# Altium PCB VALVE_MODULE_20221227.PcbDoc (part 3 of 4)
Units mm, origin at the board's own origin, x right, y up, seen from the top; angles counter-clockwise.
Board outline 260.15 x 142.01 mm, 2 copper layers (Top Layer, Bottom Layer); 455 components, 212 nets, 1302 pads, 385 vias.
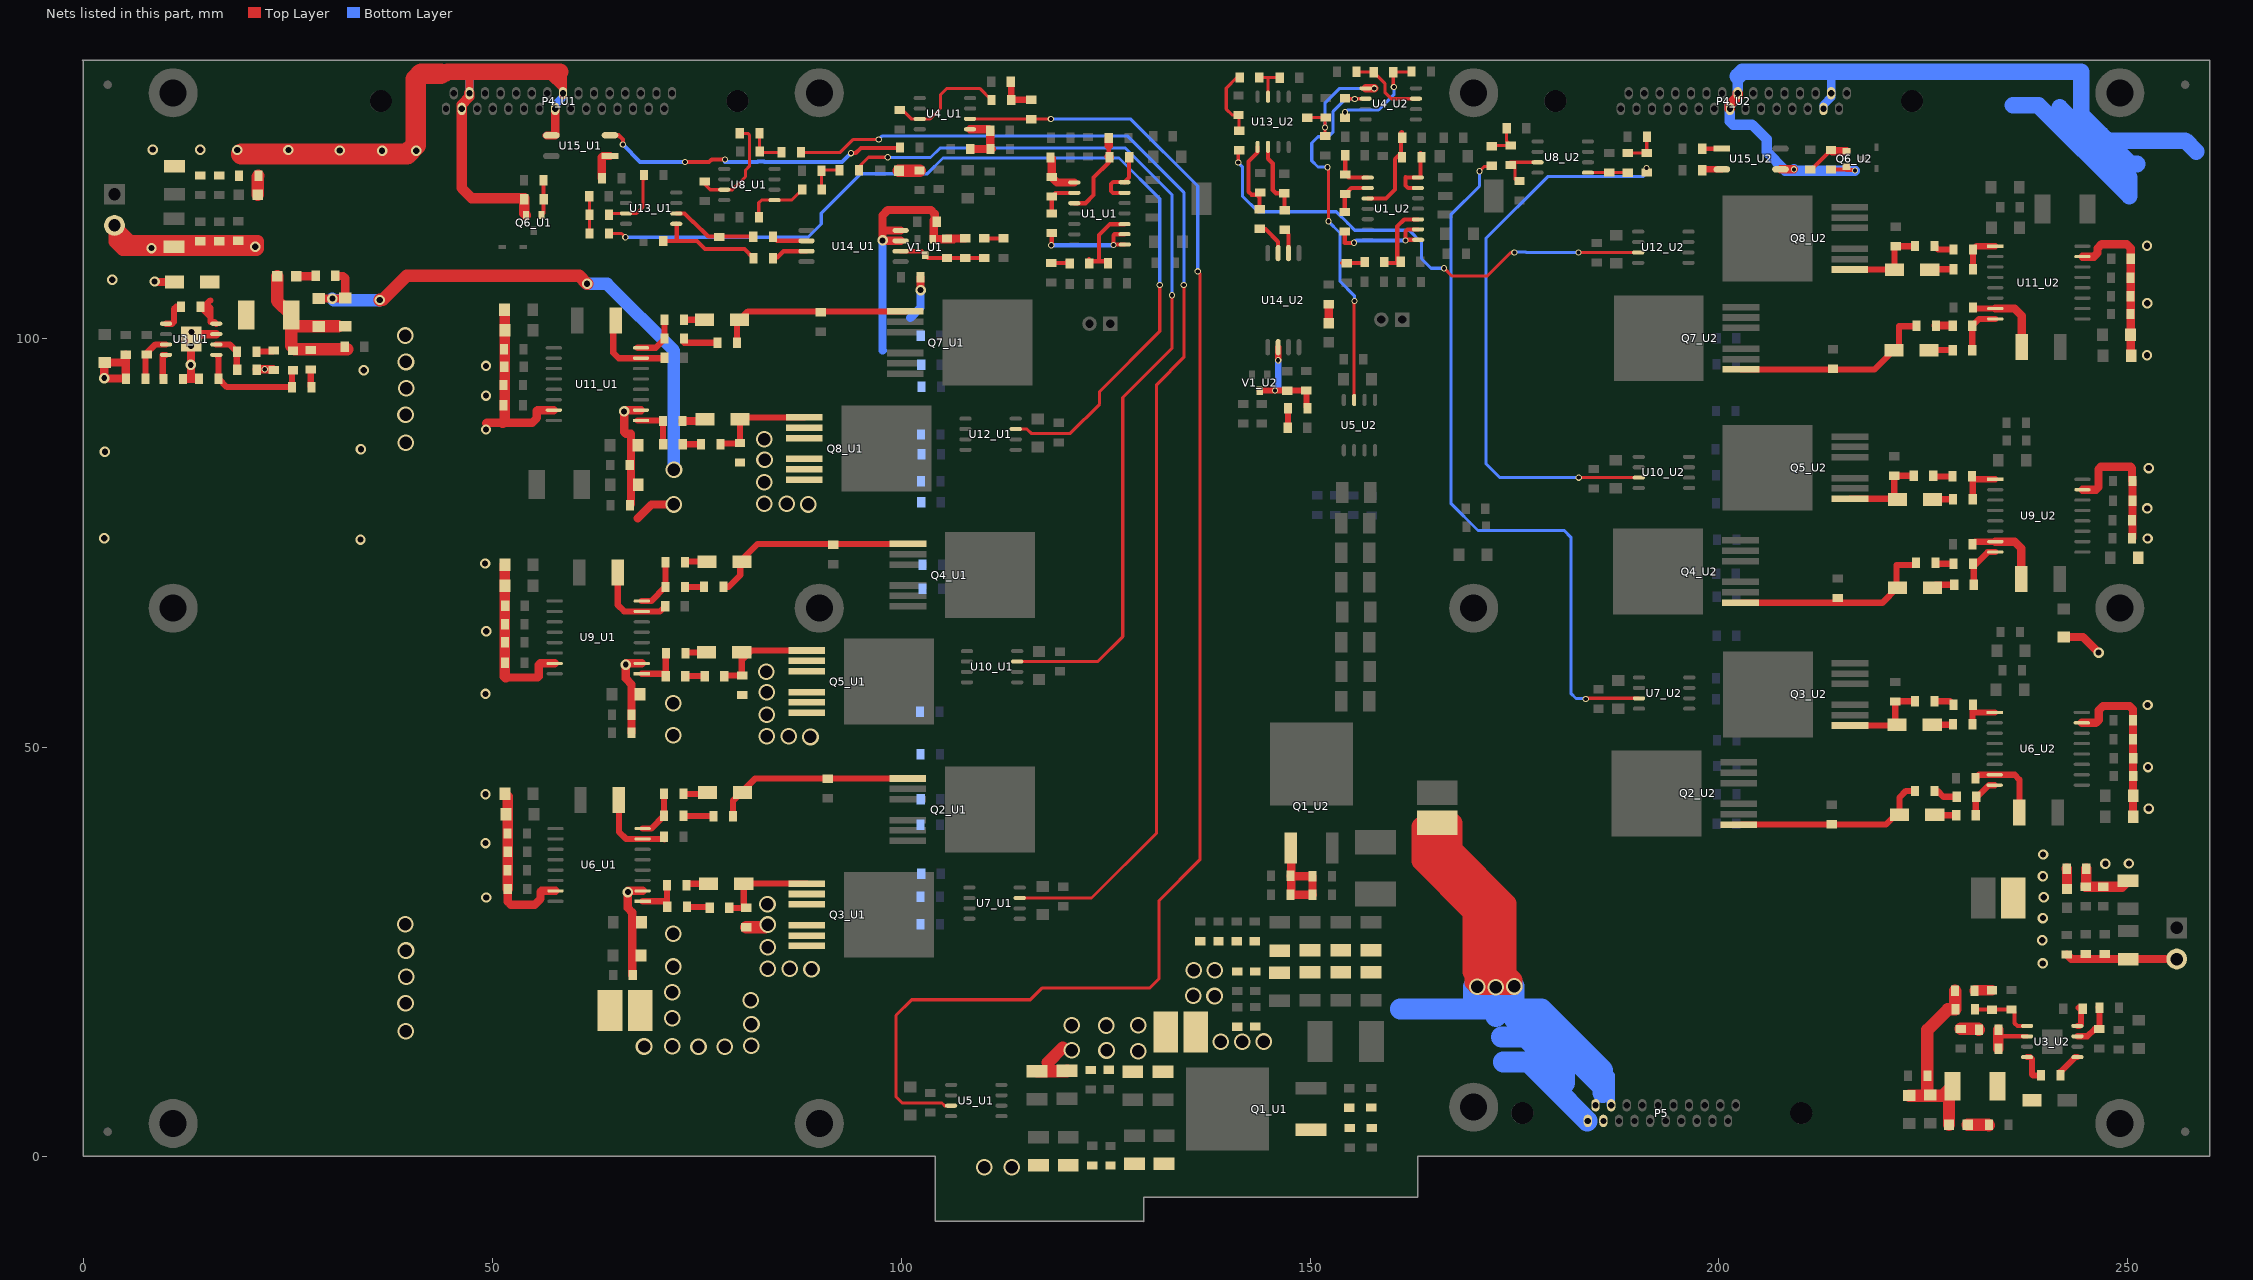
[diagram p3: the nets of this part, all layers, seen from the top]

## Via types
v1: diameter 0.762, hole 0.508, Top Layer to Bottom Layer, 142 vias
v2: diameter 2.032, hole 1.524, Top Layer to Bottom Layer, 140 vias
v3: diameter 1.27, hole 0.762, Top Layer to Bottom Layer, 77 vias
v4: diameter 1.27, hole 0.711, Top Layer to Bottom Layer, 14 vias
v5: diameter 1.778, hole 1.27, Top Layer to Bottom Layer, 12 vias

## Nets (pads, with @x,y where several pads share a name; then routed paths per layer and width w, separated by ;. In a path a pad name is that pad's centre, name@x,y a point inside that pad or via, vN(x,y) a via of type N, cw(c..) or ccw(c..) an arc to the next point about the centre after c; other vN are vias at no path point) (continued)
ISO_GND_U1: C5_U1.2 C6_U1.2 C7_U1.1 C8_U1.1 C9_U1.1 C10_U1.1 C11_U1.1 C41_U1.2 C42_U1.2 C43_U1.2 C44_U1.2 C49_U1.2 C50_U1.2 C51_U1.2 C52_U1.2 C66_U1.2 C67_U1.2 C68_U1.2 C103_U1.2 P2_U1.2 P4_U1.2 P4_U1.8 P4_U1.17 P4_U1.23 Q6_U1.2 R8_U1.1 R21_U1.1 R31_U1.2 R33_U1.2 R48_U1.2 R50_U1.2 R58_U1.1 R63_U1.2 R65_U1.2 U6_U1.15 U9_U1.15 U11_U1.15 U15_U1.4 | length 214.5
  Top Layer w1.016: P4_U1.17@47.231,129.952 47.231,131.788 47.625,132.182 57.048,132.182 ; 49.276,89.611 49.352,89.687 51.308,89.687 54.915,89.687 54.915,89.713 55.474,90.272 55.474,91.135 55.55,91.211 U11_U1.15@57.549,91.211 ; 51.689,58.547 51.714,58.522 55.575,58.522 55.702,58.649 55.702,60.046 55.905,60.249 U9_U1.15@57.651,60.249 ; R33_U1.2@51.918,32.664 51.918,31.115 52.273,30.759 55.22,30.759 55.931,31.471 55.931,32.334 56.032,32.436 U6_U1.15@57.752,32.436 ; R58_U1.1@53.924,117.018 R58_U1.1@53.924,117.119 ; U15_U1.4@56.693,124.79 57.683,124.79 57.709,124.816 P4_U1.8@57.709,128.047 ; P4_U1.23@58.661,129.952 P4_U1.23@58.661,130.569 ; 57.048,132.182 58.344,132.182 58.661,131.864 P4_U1.23@58.661,130.569 ; 57.048,132.182 P4_U1.23@58.661,130.569
  Top Layer w1.27: P4_U1.17@47.231,129.952 47.231,129.527 46.279,128.575 P4_U1.2@46.279,128.047 46.279,118.364 47.523,117.119 R58_U1.1@53.924,117.119 ; 51.308,89.687 51.537,89.916 C66_U1.2@51.537,103.48 ; C49_U1.2@51.562,72.288 C50_U1.2@51.562,69.723 C52_U1.2@51.562,65.049 R48_U1.2@51.562,62.814 R50_U1.2@51.562,60.35 51.562,58.674 51.689,58.547 ; C41_U1.2@51.587,44.298 51.918,43.967 C43_U1.2@51.918,37.211 R33_U1.2@51.918,32.664 ; R58_U1.1@53.924,117.018 53.924,115.291 Q6_U1.2@54.153,115.062
  Top Layer w1.524: 3.835,111.811 4.826,110.82 21.234,110.82 21.336,110.922 21.336,111.887 5.74,111.887 P2_U1.2@3.835,113.792 3.835,111.811
  Top Layer w2.032: 43.688,132.349 44.272,132.349 44.526,132.603 58.344,132.603
  Top Layer w2.54: 19.329,122.53 39.599,122.53 40.665,123.596 40.665,131.674 41.341,132.349 43.688,132.349
  Bottom Layer w1.016: P4_U1.17@47.231,129.952 47.231,131.788 47.701,132.258 58.369,132.258 58.661,131.966 P4_U1.23@58.661,129.952 58.661,129.476 57.709,128.524 P4_U1.8@57.709,128.047
  other v2: 39.446,15.265 39.421,18.694 39.497,21.92 39.472,25.146 39.37,28.372 39.446,87.224 39.421,90.653 39.497,93.878 39.472,97.104 39.37,100.33
  other v3: 49.276,31.623 49.2,38.278 49.2,44.247 49.2,56.515 49.276,64.186 49.149,72.466 49.251,88.849 49.251,92.989 49.251,96.622 8.357,111.023 21.031,111.201 36.551,122.911 40.716,122.911 31.369,122.961 18.847,123.012 25.095,123.012 14.326,123.038 8.509,123.063
ISO_GND_U2: C5_U2.2 C6_U2.2 C7_U2.1 C8_U2.1 C9_U2.1 C10_U2.1 C11_U2.1 C41_U2.2 C42_U2.2 C43_U2.2 C44_U2.2 C49_U2.2 C50_U2.2 C51_U2.2 C52_U2.2 C66_U2.2 C67_U2.2 C68_U2.2 C103_U2.2 P2_U2.2 P4_U2.2 P4_U2.8 P4_U2.17 P4_U2.23 Q6_U2.2 R8_U2.1 R21_U2.1 R31_U2.2 R33_U2.2 R48_U2.2 R50_U2.2 R58_U2.1 R63_U2.2 R65_U2.2 U6_U2.15 U9_U2.15 U11_U2.15 U15_U2.4 | length 228.2
  Top Layer w0.508: R58_U2.1@213.69,120.625 Q6_U2.2@215.24,120.625 ; Q6_U2.2@215.595,120.98 Q6_U2.2@215.24,120.625 ; v1(216.611,120.498) 216.611,120.548 216.586,120.574 215.57,120.574 215.519,120.625 Q6_U2.2@215.24,120.625
  Top Layer w1.016: U15_U2.4@207.518,120.65 v1(209.169,120.65) ; C50_U2.2@242.164,63.475 244.5,63.475 v3(246.405,61.57) ; C8_U2.1@242.519,24.663 243.078,24.105 C5_U2.2@250.038,24.105 P2_U2.2@255.956,24.105 ; U6_U2.15@244.355,52.984 246.075,52.984 246.431,53.34 246.431,54.534 246.939,55.042 250.215,55.042 250.622,54.635 R33_U2.2@250.622,53.315 R31_U2.2@250.622,50.952 250.622,41.504 C42_U2.2@250.647,41.478 ; U9_U2.15@244.432,81.483 246.101,81.483 246.405,81.788 246.405,83.998 246.685,84.277 250.342,84.277 250.495,84.125 250.495,82.601 R50_U2.2@250.546,82.55 R48_U2.2@250.546,80.112 250.546,75.59 C51_U2.2@250.495,75.54 ; U11_U2.15@244.432,109.982 245.847,109.982 246.278,110.414 246.278,110.998 246.786,111.506 249.834,111.506 250.342,110.998 R65_U2.2@250.342,109.703 250.342,97.892 C66_U2.2@250.393,97.841
  Top Layer w1.27: P4_U2.23@201.336,128.047 201.336,128.565 202.288,129.517 P4_U2.8@202.288,129.952 ; R8_U2.1@244.907,35.154 244.907,33.02 C7_U2.1@244.831,32.944 C11_U2.1@246.964,32.944 249.25,32.944 C6_U2.2@249.987,33.68
  Bottom Layer w1.016: P4_U2.17@212.766,128.047 212.766,128.514 213.718,129.466 P4_U2.2@213.718,129.952 213.718,132.56 213.69,132.588
  Bottom Layer w1.27: 202.311,132.029 202.288,132.006 P4_U2.8@202.288,129.952 202.288,129.441 201.336,128.489 P4_U2.23@201.336,128.047 201.336,126.502 201.727,126.111 204.038,126.111 205.816,124.333 205.816,122.784 208.102,120.498 v1@209.321,120.498 ; v1(209.169,120.65) v1@209.321,120.498 ; v1(216.611,120.498) v1@209.321,120.498
  Bottom Layer w2.032: 202.311,132.029 202.87,132.588 213.69,132.588 244.272,132.588 244.272,127.381 ; 235.941,128.499 235.941,128.473 239.065,128.473 250.165,117.373 250.165,119.685 244.272,125.578 244.272,125.628 ; 241.656,128.245 244.272,125.628 ; 251.155,121.31 250.342,121.31 247.498,124.155 ; 258.343,122.834 257.023,124.155 247.498,124.155 ; 244.272,125.628 244.958,124.943 246.71,124.943 ; 244.272,125.628 244.272,127.381 ; 244.272,127.381 246.71,124.943 ; 246.71,124.943 247.498,124.155
  other v3: 239.573,23.571 239.522,26.416 239.598,29.108 239.7,31.648 239.598,34.239 247.244,35.763 250.114,35.789 239.624,36.881 252.552,42.494 252.451,47.574 252.4,55.169 252.4,75.514 252.349,79.197 252.527,84.125 252.324,97.917 252.349,104.292 252.324,111.303
NetC13_U1_1: C13_U1.1 D2_U1.2 L1_U1.2 U3_U1.8 | length 6.6
  Top Layer w0.762: 15.57,104.623 C13_U1.1@14.808,103.861 ; U3_U1.8@16.281,101.778 16.078,101.981 15.57,101.981 15.57,102.641 ; C13_U1.1@14.808,103.861 15.418,103.861 15.57,103.708 15.57,102.641 ; C13_U1.1@14.808,103.861 C13_U1.1@14.351,103.861 15.57,102.641
NetC13_U1_2: C13_U1.2 U3_U1.1 | length 3.6
  Top Layer w0.762: U3_U1.1@10.135,101.778 10.871,101.778 11.1,102.006 11.1,103.581 11.379,103.861 C13_U1.2@11.963,103.861
NetC13_U2_1: C13_U2.1 D2_U2.2 L1_U2.2 U3_U2.8 | length 3.7
  Top Layer w0.762: U3_U2.8@237.668,12.116 238.023,12.116 238.277,11.862 238.277,9.982 238.379,9.881 C13_U2.1@239.37,9.881
NetC13_U2_2: C13_U2.2 U3_U2.1 | length 3.3
  Top Layer w0.762: C13_U2.2@241.757,9.881 241.757,10.338 243.535,12.116 U3_U2.1@243.815,12.116
NetC14_U1_1: C14_U1.1 R13_U1.1 R14_U1.2 U4_U1.5 | length 7.5
  Top Layer w1.016: U4_U1.5@108.433,125.552 110.719,125.552 C14_U1.1@110.896,125.374 110.896,123.317 111.074,123.139 R13_U1.1@108.458,123.139
NetC14_U2_1: C14_U2.1 R13_U2.1 R14_U2.2 U4_U2.5 | length 15.2
  Top Layer w0.381: C14_U2.1@149.682,126.975 R14_U2.2@151.917,126.975 ; R13_U2.1@151.841,124.714 R14_U2.2@151.841,126.822
  Top Layer w1.016: U4_U2.5@156.794,130.556 v1(157.861,130.556)
  Bottom Layer w0.381: v1(151.816,125.781) 151.816,128.753 153.619,130.556 v1(157.861,130.556)
NetC21_U1_1: C21_U1.1 C22_U1.1 C23_U1.1 D3_U1.1 L1_U1.1 R20_U1.2 R40_U1.1 | length 22.1
  Top Layer w1.524: D3_U1.1@23.724,107.569 23.724,104.572 L1_U1.1@25.451,102.845 25.451,101.092 ; 31.217,101.448 25.806,101.448 25.451,101.092 ; R40_U1.1@32.309,98.679 30.124,98.679 25.857,98.679 25.451,99.085 25.451,101.092
NetC21_U2_1: C21_U2.1 C22_U2.1 C23_U2.1 D3_U2.1 L1_U2.1 R20_U2.2 R40_U2.1 | length 24.9
  Top Layer w1.524: C22_U2.1@223.241,7.417 227.406,7.417 L1_U2.1@228.117,8.128 ; C21_U2.1@225.806,7.468 225.476,7.798 R40_U2.1@225.476,9.855 225.476,15.443 227.99,17.958 C23_U2.1@228.905,17.958 228.905,20.193 R20_U2.2@228.854,20.244 ; D3_U2.1@228.117,3.861 L1_U2.1@228.117,8.128 ; L1_U2.1@228.549,8.56 L1_U2.1@228.117,8.128
NetC23_U1_2: C23_U1.2 R19_U1.1 R22_U1.2 U3_U1.5 | length 14.2
  Top Layer w0.762: 16.535,97.714 16.561,97.688 R22_U1.2@16.561,95.047 17.577,94.031 R19_U1.1@25.552,94.031 25.552,95.987 C23_U1.2@25.654,96.088
NetC23_U2_2: C23_U2.2 R19_U2.1 R22_U2.2 U3_U2.5 | length 8
  Top Layer w0.508: C23_U2.2@231.292,17.958 231.318,17.932 R22_U2.2@235.763,17.932 236.144,17.551 236.144,16.256 236.499,15.9 236.525,15.926 U3_U2.5@237.668,15.926
NetC26_U1_2: C26_U1.2 U3_U1.4 | length 3.4
  Top Layer w0.762: C26_U1.2@9.83,95.021 9.728,95.123 9.728,97.942 10.109,97.942 U3_U1.4@10.135,97.968
NetC26_U2_2: C26_U2.2 U3_U2.4 | length 2.7
  Top Layer w0.762: U3_U2.4@243.815,15.926 244.069,15.926 244.246,16.104 244.246,17.907 C26_U2.2@243.992,18.161
NetC27_U1_2: C27_U1.2 C28_U1.2 U3_U1.6 | length 5.1
  Top Layer w0.762: U3_U1.6@16.281,99.238 17.932,99.238 C28_U1.2@18.796,98.374 18.796,96.266 C27_U1.2@18.847,96.215
NetC27_U2_2: C27_U2.2 C28_U2.2 U3_U2.6 | length 5.8
  Top Layer w0.508: 234.163,14.656 U3_U2.6@237.668,14.656
  Top Layer w1.27: C27_U2.2@234.163,13.157 234.163,14.656 C28_U2.2@234.163,15.469
NetC28_U1_1: C28_U1.1 R25_U1.2 | length 2.2
  Top Layer w0.762: C28_U1.1@21.184,98.374 23.19,98.374 R25_U1.2@23.317,98.501
NetC28_U2_1: C28_U2.1 R25_U2.2 | length 2.3
  Top Layer w1.524: R25_U2.2@229.54,15.57 231.673,15.57 C28_U2.1@231.775,15.469
NetC31_U1_1: C31_U1.1 R28_U1.2 R29_U1.1 | length 4.7
  Top Layer w0.762: C31_U1.1@113.411,131.343 113.462,131.293 R28_U1.2@113.462,129.134 113.487,129.159 R29_U1.1@115.926,129.159
NetC31_U2_1: C31_U2.1 R28_U2.2 R29_U2.1 | length 12.5
  Top Layer w0.381: R29_U2.1@154.28,127.152 v1(154.28,127.635) v1@154.28,127.711 ; v1(160.249,130.708) 160.172,130.785 R28_U2.2@160.172,132.537 160.198,132.563 162.357,132.563 C31_U2.1@162.408,132.613
  Bottom Layer w0.381: v1(154.28,127.635) 154.559,127.914 158.394,127.914 160.249,129.769 v1(160.249,130.708)
NetC32_U1_1: C32_U1.1 D6_U1.2 U6_U1.7 | length 9.8
  Top Layer w0.762: D6_U1.2@65.507,43.561 65.507,39.649 66.37,38.786 U6_U1.7@68.402,38.786 71.044,38.786 C32_U1.1@71.069,38.76
NetC32_U2_1: C32_U2.1 D6_U2.2 U6_U2.7 | length 9.8
  Top Layer w0.762: C32_U2.1@231.369,46.228 231.775,46.634 U6_U2.7@233.705,46.634 236.144,46.634 236.728,46.05 D6_U2.2@236.728,42.012
NetC33_U1_1: C33_U1.1 R28_U1.1 U4_U1.3 | length 14.9
  Top Layer w0.381: C33_U1.1@99.822,127.914 99.885,127.978 100.089,127.978 101.244,126.822 U4_U1.3@102.286,126.822 103.556,126.822 104.826,128.092 104.826,129.769 105.613,130.556 109.601,130.556 111.023,129.134 R28_U1.1@111.074,129.134
NetC33_U2_1: C33_U2.1 R28_U2.1 U4_U2.3 | length 9.3
  Top Layer w0.381: C33_U2.1@155.677,132.563 157.759,132.563 R28_U2.1@157.785,132.537 159.156,131.166 159.156,130.073 159.944,129.286 U4_U2.3@162.941,129.286
NetC45_U1_1: C45_U1.1 R43_U1.2 R44_U1.1 | length 4.9
  Top Layer w0.381: R43_U1.2@82.677,125.044 82.677,122.885 C45_U1.1@82.728,122.834 82.829,122.733 R44_U1.1@85.369,122.733
NetC45_U2_1: C45_U2.1 R43_U2.2 R44_U2.1 | length 4.5
  Top Layer w0.381: R44_U2.1@172.339,123.571 R43_U2.2@174.549,123.571 174.041,124.079 C45_U2.1@174.041,125.679
NetC46_U1_1: C46_U1.1 R43_U1.1 U8_U1.3 | length 13
  Top Layer w0.381: C46_U1.1@75.641,119.177 76.657,118.161 U8_U1.3@78.384,118.161 79.375,118.161 80.975,119.761 80.975,120.548 81.458,121.031 81.458,124.866 81.28,125.044 R43_U1.1@80.289,125.044
NetC46_U2_1: C46_U2.1 R43_U2.1 U8_U2.3 | length 5.5
  Top Layer w0.381: R43_U2.1@174.447,121.514 R43_U2.1@175.133,121.514 ; C46_U2.1@175.057,119.431 175.057,121.437 R43_U2.1@175.133,121.514 ; U8_U2.3@177.825,121.514 R43_U2.1@175.133,121.514
NetC47_U1_2: C47_U1.2 D11_U1.2 U9_U1.7 | length 10.4
  Top Layer w0.762: D11_U1.2@65.354,71.374 65.354,67.386 66.142,66.599 U9_U1.7@68.301,66.599 70.536,66.599 C47_U1.2@71.171,67.234
NetC47_U2_2: C47_U2.2 D11_U2.2 U9_U2.7 | length 10.2
  Top Layer w0.762: C47_U2.2@230.988,74.828 231.292,75.133 U9_U2.7@233.782,75.133
  Top Layer w1.016: U9_U2.7@233.782,75.133 236.144,75.133 236.957,74.32 D11_U2.2@236.957,70.561
NetC48_U1_1: C48_U1.1 R56_U1.2 R57_U1.1 | length 4.5
  Top Layer w0.381: R56_U1.2@90.297,118.186 90.272,118.212 C48_U1.1@90.272,120.472 90.348,120.548 R57_U1.1@92.456,120.548
NetC48_U2_1: C48_U2.1 R56_U2.2 R57_U2.1 | length 4.3
  Top Layer w0.381: R56_U2.2@188.849,122.631 191.135,122.631 R57_U2.1@191.16,122.657 191.16,124.587 C48_U2.1@191.211,124.638
NetC53_U1_1: C53_U1.1 R56_U1.1 U8_U1.5 | length 7.8
  Top Layer w0.381: C53_U1.1@82.652,114.783 82.601,114.833 82.601,116.561 82.931,116.891 U8_U1.5@84.531,116.891 86.614,116.891 R56_U1.1@87.909,118.186
NetC53_U2_1: C53_U2.1 R56_U2.1 U8_U2.5 | length 4.9
  Top Layer w0.381: U8_U2.5@183.972,120.244 R56_U2.1@188.849,120.244
NetC54_U1_2: C54_U1.2 D16_U1.2 U11_U1.7 | length 10.7
  Top Layer w0.762: D16_U1.2@64.821,102.667 64.821,98.222 65.481,97.561 67.767,97.561 C54_U1.2@70.841,97.561
NetC54_U2_2: C54_U2.2 D16_U2.2 U11_U2.7 | length 10.2
  Top Layer w0.762: C54_U2.2@231.064,103.759 231.191,103.632 U11_U2.7@233.782,103.632
  Top Layer w1.016: U11_U2.7@233.782,103.632 236.144,103.632 237.007,102.768 D16_U2.2@237.007,98.958
NetC61_U1_1: C61_U1.1 R69_U1.2 R70_U1.1 | length 4.6
  Top Layer w0.381: C61_U1.1@61.874,117.348 61.9,117.323 R69_U1.2@61.9,115.087 R70_U1.1@61.9,112.801
NetC61_U2_1: C61_U2.1 R69_U2.2 R70_U2.1 | length 8.5
  Top Layer w0.381: R70_U2.1@141.326,125.374 141.326,127.229 C61_U2.1@141.249,127.305 140.462,127.305 139.751,128.016 139.751,130.581 141.046,131.877 R69_U2.2@141.402,131.877
NetC64_U1_1: C64_U1.1 R69_U1.1 U13_U1.3 | length 8.2
  Top Layer w0.381: R69_U1.1@64.287,115.087 64.465,115.265 U13_U1.3@66.37,115.265 67.666,115.265 68.428,116.027 68.428,119.456 C64_U1.1@68.707,119.456
NetC64_U2_1: C64_U2.1 R69_U2.1 U13_U2.3 | length 4.8
  Top Layer w0.381: R69_U2.1@143.789,131.877 146.279,131.877 C64_U2.1@146.304,131.851 ; U13_U2.3@144.856,129.54 144.856,131.775
NetC69_U1_2: C69_U1.2 R75_U1.2 R76_U1.1 U14_U1.2 V1_U1.3 | length 10.6
  Top Layer w0.508: U14_U1.2@99.949,110.642 102.489,110.642 V1_U1.3@102.946,110.185 103.302,109.83 R76_U1.1@107.848,109.83 R75_U1.2@110.185,109.83
NetC69_U2_2: C69_U2.2 R75_U2.2 R76_U2.1 U14_U2.2 V1_U2.3 | length 13.4
  Top Layer w0.762: V1_U2.3@143.84,93.599 R76_U2.1@149.555,93.599 149.555,91.592 R75_U2.2@149.708,91.44 ; v1(146.101,97.307) U14_U2.2@146.101,98.908
  Bottom Layer w0.762: v1(145.72,93.624) 146.101,94.005 v1(146.101,97.307)
NetD1_U1_2: D1_U1.2 R8_U1.2 | length 2.4
  Top Layer w1.524: D1_U1.2@21.336,117.551 21.336,119.761 R8_U1.2@21.438,119.863
NetD1_U2_2: D1_U2.2 R8_U2.2 | length 2.5
  Top Layer w1.27: R8_U2.2@242.519,35.154 242.545,35.128 D1_U2.2@242.545,32.664
NetD3_U1_2: D3_U1.2 R16_U1.1 | length 2.4
  Top Layer w1.016: D3_U1.2@26.035,107.569 28.397,107.569 R16_U1.1@28.448,107.62
NetD3_U2_2: D3_U2.2 R16_U2.1 | length 2.6
  Top Layer w1.524: D3_U2.2@230.429,3.861 232.943,3.861 R16_U2.1@232.994,3.81
NetD5_U1_1: D5_U1.1 Q2_U1.1 R27_U1.2 R30_U1.1 | length 24.4
  Top Layer w0.762: R27_U1.2@79.451,41.58 79.451,43.459 82.169,46.177 Q2_U1.1@100.813,46.177
NetD5_U1_2: D5_U1.2 R23_U1.2 | length 3.1
  Top Layer w0.762: R23_U1.2@73.33,44.298 76.142,44.298 D5_U1.2@76.32,44.475
NetD5_U2_1: D5_U2.1 Q2_U2.1 R27_U2.2 R30_U2.1 | length 23.9
  Top Layer w0.762: Q2_U2.1@202.413,40.538 220.396,40.538 D5_U2.1@221.539,41.681 ; D5_U2.1@222.072,41.758 222.072,43.866 222.86,44.653 R27_U2.2@223.952,44.653
NetD5_U2_2: D5_U2.2 R23_U2.2 | length 3.2
  Top Layer w0.762: D5_U2.2@225.839,41.681 R23_U2.2@229.006,41.681
NetD9_U1_1: D9_U1.1 Q3_U1.1 R36_U1.2 R37_U1.2 | length 12.4
  Top Layer w0.762: R36_U1.2@78.994,30.353 80.747,30.353 80.772,30.378 D9_U1.1@80.772,33.299 80.797,33.325 Q3_U1.1@88.468,33.325
NetD9_U1_2: D9_U1.2 R32_U1.2 | length 2.8
  Top Layer w0.762: R32_U1.2@73.787,33.122 73.965,33.299 D9_U1.2@76.472,33.299
NetD9_U2_1: D9_U2.1 Q3_U2.1 R36_U2.2 R37_U2.2 | length 10.8
  Top Layer w0.762: Q3_U2.1@216.027,52.654 221.437,52.654 221.539,52.756 R37_U2.2@221.539,55.575 221.59,55.626 R36_U2.2@223.977,55.626
NetD9_U2_2: D9_U2.2 R32_U2.2 | length 2.8
  Top Layer w0.762: D9_U2.2@225.839,52.756 228.549,52.756 R32_U2.2@228.6,52.807
NetD10_U1_1: D10_U1.1 Q4_U1.1 R42_U1.2 R47_U1.2 | length 25.7
  Top Layer w0.762: R42_U1.2@78.308,69.621 78.918,69.621 80.34,71.044 80.34,72.72 82.474,74.854 Q4_U1.1@100.838,74.854
NetD10_U1_2: D10_U1.2 R39_U1.2 | length 2.7
  Top Layer w0.762: R39_U1.2@73.584,72.593 73.685,72.695 D10_U1.2@76.269,72.695
NetD10_U2_1: D10_U2.1 Q4_U2.1 R42_U2.2 R47_U2.2 | length 25.2
  Top Layer w0.762: Q4_U2.1@202.616,67.666 219.989,67.666 D10_U2.1@221.818,69.494 221.717,69.596 221.717,72.263 223.799,72.263 R42_U2.2@224.079,72.542
NetD10_U2_2: D10_U2.2 R39_U2.2 | length 2.8
  Top Layer w0.762: D10_U2.2@226.118,69.494 226.499,69.875 R39_U2.2@228.752,69.875
NetD14_U1_1: D14_U1.1 Q5_U1.1 R53_U1.2 R54_U1.2 | length 13.4
  Top Layer w0.762: R53_U1.2@78.257,58.776 R54_U1.2@80.569,58.776 ; R54_U1.2@80.518,58.725 D14_U1.1@80.518,61.595 ; 80.645,60.782 81.686,61.824 Q5_U1.1@88.468,61.824
NetD14_U1_2: D14_U1.2 R49_U1.2 | length 2.5
  Top Layer w0.762: R49_U1.2@73.736,61.57 D14_U1.2@76.193,61.57
NetD14_U2_1: D14_U2.1 Q5_U2.1 R53_U2.2 R54_U2.2 | length 10.5
  Top Layer w0.762: Q5_U2.1@216.002,80.366 221.259,80.366 221.285,80.391 221.437,80.543 R54_U2.2@221.437,83.185 R53_U2.2@223.799,83.185
NetD14_U2_2: D14_U2.2 R49_U2.2 | length 3.1
  Top Layer w0.762: D14_U2.2@225.585,80.391 225.661,80.315 R49_U2.2@228.625,80.315
NetD15_U1_1: D15_U1.1 Q7_U1.1 R61_U1.2 R62_U1.2 | length 23.6
  Top Layer w0.762: R61_U1.2@79.934,99.441 79.934,101.93 D15_U1.1@80.264,102.26 81.28,103.276 Q7_U1.1@100.508,103.276
NetD15_U1_2: D15_U1.2 R59_U1.2 | length 2.5
  Top Layer w0.762: R59_U1.2@73.457,102.26 D15_U1.2@75.964,102.26
NetD15_U2_1: D15_U2.1 Q7_U2.1 R61_U2.2 R62_U2.2 | length 25
  Top Layer w0.762: Q7_U2.1@202.692,96.19 219.024,96.19 D15_U2.1@221.386,98.552 221.996,99.162 221.996,101.473 224.053,101.473 R61_U2.2@224.13,101.549
NetD15_U2_2: D15_U2.2 R59_U2.2 | length 2.9
  Top Layer w0.762: D15_U2.2@225.686,98.552 228.549,98.552 R59_U2.2@228.575,98.527
NetD18_U1_1: D18_U1.1 Q8_U1.1 R67_U1.2 R68_U1.2 | length 13.3
  Top Layer w0.762: R67_U1.2@77.927,87.046 78.003,87.122 80.315,87.122 D18_U1.1@80.315,90.094 D18_U1.1@80.543,90.322 ; D18_U1.1@80.62,90.322 Q8_U1.1@88.163,90.322
NetD18_U1_2: D18_U1.2 R64_U1.2 | length 2.8
  Top Layer w1.016: R64_U1.2@73.279,89.891 75.812,89.891 D18_U1.2@76.015,90.094
NetD18_U2_1: D18_U2.1 Q8_U2.1 R67_U2.2 R68_U2.2 | length 10.9
  Top Layer w0.508: D18_U2.1@221.437,108.407 D18_U2.1@221.463,108.382 ; R68_U2.2@221.437,111.074 221.463,111.1 R68_U2.2@221.615,111.252 R68_U2.2@221.64,111.277
  Top Layer w0.762: Q8_U2.1@215.976,108.407 D18_U2.1@221.437,108.407 ; D18_U2.1@221.463,108.382 R68_U2.2@221.463,111.1 ; R68_U2.2@221.615,111.252 223.952,111.252 R67_U2.2@223.977,111.277
NetD18_U2_2: D18_U2.2 R64_U2.2 | length 3
  Top Layer w0.508: R64_U2.2@228.6,108.382 R64_U2.2@228.651,108.433
  Top Layer w0.762: D18_U2.2@225.763,108.382 225.813,108.433 R64_U2.2@228.651,108.433
NetD19_U1_2: D19_U1.2 R71_U1.2 | length 2.5
  Top Layer w1.524: D19_U1.2@99.746,120.472 102.235,120.472 R71_U1.2@102.26,120.498
NetD19_U2_2: D19_U2.2 R71_U2.2 | length 2.3
  Top Layer w1.016: D19_U2.2@152.298,101.829 R71_U2.2@152.298,104.165
NetQ1_U1_1: Q1_U1.1 R15_U1.2 R18_U1.1 R34_U1.2 R38_U1.1
NetQ1_U2_1: Q1_U2.1 R15_U2.2 R18_U2.1 R34_U2.2 R38_U2.1 | length 13.3
  Top Layer w1.016: R18_U2.1@147.625,34.265 147.676,34.214 R18_U2.1@147.701,34.214 ; Q1_U2.1@147.625,37.694 147.701,37.617 R18_U2.1@147.701,34.214 ; R15_U2.2@150.317,31.953 R15_U2.2@150.292,31.979 ; R18_U2.1@147.701,34.214 147.701,31.953 150.266,31.953 R15_U2.2@150.292,31.979 ; R18_U2.1@147.701,34.214 R34_U2.2@150.292,34.214 R15_U2.2@150.292,31.979
NetQ6_U1_1: Q6_U1.1 R55_U1.1 R58_U1.2 | length 4.3
  Top Layer w0.508: Q6_U1.1@56.032,115.062 56.286,115.316 R55_U1.1@56.286,119.304
NetQ6_U2_1: Q6_U2.1 R55_U2.1 R58_U2.2 | length 5.5
  Top Layer w0.508: R55_U2.1@211.15,120.65 211.328,120.65 R58_U2.2@213.69,123.012
  Top Layer w1.016: R58_U2.2@213.69,123.012 213.843,122.86 Q6_U2.1@215.595,122.86
NetR1_U1_1: R1_U1.1 R5_U1.1 U1_U1.1 | length 5.5
  Top Layer w1.016: R5_U1.1@118.288,122.098 118.415,121.971 R1_U1.1@118.415,119.71 119.075,119.05 U1_U1.1@121.183,119.05
NetR1_U1_2: R1_U1.2 R2_U1.1 U1_U1.2 | length 5
  Top Layer w0.508: R2_U1.1@118.415,115.265 R1_U1.2@118.415,117.323 118.872,117.78 U1_U1.2@121.183,117.78
NetR1_U2_1: R1_U2.1 R5_U2.1 U1_U2.1 | length 5.2
  Top Layer w0.508: R5_U2.1@154.305,122.352 R1_U2.1@154.305,120.015 154.686,119.634 U1_U2.1@157.048,119.634
NetR1_U2_2: R1_U2.2 R2_U2.1 U1_U2.2 | length 5.3
  Top Layer w0.508: R2_U2.1@154.254,115.443 154.254,117.577 R1_U2.2@154.305,117.627 155.042,118.364 U1_U2.2@157.048,118.364
NetR2_U1_2: R2_U1.2 U1_U1.8 U1_U1.9 | length 13.2
  Top Layer w0.508: v1(118.364,111.379) 118.389,111.379 118.415,111.354 R2_U1.2@118.415,112.878 ; U1_U1.9@127.33,112.725 126.086,112.725 125.959,112.598 v1(125.959,111.404) 126.009,111.455 U1_U1.8@127.356,111.455
  Bottom Layer w0.508: v1(118.364,111.379) 125.959,111.379 v1(125.959,111.404)
NetR2_U2_2: R2_U2.2 U1_U2.8 U1_U2.9 | length 13.2
  Top Layer w0.508: 154.254,111.887 154.254,111.658 ; R2_U2.2@154.254,113.055 154.254,111.658 ; v1@155.016,111.658 154.254,111.658 ; U1_U2.9@163.195,113.309 161.9,113.309 161.671,113.081 v1(161.671,111.963) 161.747,112.039 U1_U2.8@163.22,112.039
  Bottom Layer w0.508: v1@155.346,111.658 155.651,111.963 v1(161.671,111.963)
  other v1: 155.372,111.684
NetR3_U1_2: R3_U1.2 R7_U1.1 U1_U1.10 | length 9.3
  Top Layer w0.508: R7_U1.1@122.961,109.652 123.19,109.423 124.206,109.423 ; R3_U1.2@125.298,109.423 124.206,109.423 ; U1_U1.10@127.33,113.944 125.527,113.944 124.206,112.624 124.206,109.423
NetR3_U2_2: R3_U2.2 R7_U2.1 U1_U2.10 | length 9.2
  Top Layer w0.508: R7_U2.1@159.41,109.195 R3_U2.2@160.934,109.195 ; R3_U2.2@161.087,109.347 R3_U2.2@160.934,109.195 ; U1_U2.10@163.195,114.529 161.519,114.529 160.655,113.665 160.655,109.474 R3_U2.2@160.934,109.195
NetR6_U1_1: R6_U1.1 R12_U1.1 U1_U1.3 | length 10.7
  Top Layer w0.508: U1_U1.3@121.183,116.51 122.53,116.51 123.546,117.526 123.546,119.659 125.4,121.514 125.4,122.225 125.4,123.495
  Top Layer w1.016: R6_U1.1@125.4,122.225 R6_U1.1@125.501,122.123 ; 125.4,123.495 R12_U1.1@125.4,124.485
NetR6_U1_2: R6_U1.2 U1_U1.13 U1_U1.14 | length 7.6
  Top Layer w0.508: U1_U1.13@127.33,117.78 125.908,117.78 125.679,118.008 125.679,118.847 125.933,119.101 127.305,119.101 U1_U1.14@127.33,119.075 127.889,119.634 R6_U1.2@127.889,122.123
NetR6_U2_1: R6_U2.1 R12_U2.1 U1_U2.3 | length 11.2
  Top Layer w0.508: U1_U2.3@157.048,117.094 159.309,117.094 160.401,118.186 160.401,121.895 161.138,122.631 161.138,125.146 161.214,125.222
NetR6_U2_2: R6_U2.2 U1_U2.13 U1_U2.14 | length 7.5
  Top Layer w0.508: U1_U2.13@163.195,118.364 162.001,118.364 161.671,118.694 161.671,119.685 161.696,119.659 U1_U2.14@163.195,119.659 163.5,119.659 163.525,119.634 R6_U2.2@163.525,122.631
NetR7_U1_2: R7_U1.2 R10_U1.2 | length 2.1
  Top Layer w0.508: R10_U1.2@118.364,109.195 120.117,109.195 R7_U1.2@120.383,109.461
NetR7_U2_2: R7_U2.2 R10_U2.2 | length 2.3
  Top Layer w0.508: R10_U2.2@153.924,109.22 156.159,109.22 156.185,109.195
NetR17_U1_2: R17_U1.2 R24_U1.1 U3_U1.3 | length 6
  Top Layer w0.762: R24_U1.1@7.62,95.072 7.62,98.019 8.839,99.238 U3_U1.3@10.135,99.238
NetR17_U2_2: R17_U2.2 R24_U2.1 U3_U2.3 | length 5.8
  Top Layer w0.762: U3_U2.3@243.815,14.656 245.034,14.656 245.923,15.545 R17_U2.2@246.507,15.545 R24_U2.1@246.507,18.136 R24_U2.1@246.431,18.212
NetR19_U1_2: R19_U1.2 R20_U1.1 | length 2.2
  Top Layer w0.762: R20_U1.1@27.838,96.19 27.838,94.132 R19_U1.2@27.94,94.031
NetR19_U2_2: R19_U2.2 R20_U2.1 | length 2.2
  Top Layer w1.27: R20_U2.1@231.242,20.244 231.292,20.295 R19_U2.2@233.375,20.295
NetR23_U1_1: R23_U1.1 R26_U1.1 U6_U1.8 | length 6
  Top Layer w0.762: U6_U1.8@68.402,40.056 69.469,40.056 R26_U1.1@71.018,41.605 R23_U1.1@71.018,44.298
NetR23_U2_1: R23_U2.1 R26_U2.1 U6_U2.8 | length 5.1
  Top Layer w0.762: R23_U2.1@231.394,41.681 231.394,43.764 232.994,45.364 U6_U2.8@233.705,45.364
NetR26_U1_2: R26_U1.2 R27_U1.1 | length 3.7
  Top Layer w0.762: R26_U1.2@73.406,41.605 73.431,41.58 R27_U1.1@77.064,41.58
NetR26_U2_2: R26_U2.2 R27_U2.1 | length 3
  Top Layer w0.762: R27_U2.1@226.339,44.653 226.72,44.653 227.432,43.942 R26_U2.2@229.057,43.942
NetR29_U1_2: R29_U1.2 U4_U1.6 U5_U1.7 | length 181.5
  Top Layer w0.381: U5_U1.7@106.121,6.172 105.334,6.172 105.004,6.502 100.152,6.502 99.39,7.264 99.39,17.221 101.295,19.126 115.799,19.126 117.221,20.549 130.378,20.549 131.547,21.717 131.547,31.267 136.525,36.246 136.525,107.925 v1(136.271,108.179) ; U4_U1.6@108.433,126.822 v1(118.313,126.822)
  Bottom Layer w0.381: v1(118.313,126.822) 118.77,126.822 118.745,126.797 128.092,126.797 136.271,118.618 v1(136.271,108.179)
NetR29_U2_2: R29_U2.2 U4_U2.6 U5_U2.7 | length 45.8
  Top Layer w0.381: v1(152.248,114.3) v1@152.248,120.809 ; R29_U2.2@154.33,129.286 v1@155.727,129.286 ; U5_U2.7@155.397,92.456 155.397,104.521 v1(155.423,104.546) ; 155.956,129.286 v1@155.727,129.286 ; U4_U2.6@156.794,129.286 v1@155.727,129.286
  Bottom Layer w0.381: v1(152.248,114.3) 153.67,112.878 153.67,106.959 155.423,105.207 v1(155.423,104.546) ; v1@152.248,120.929 150.978,120.929 150.216,121.691 150.216,123.876 150.978,124.638 152.222,124.638 152.832,125.247 152.832,127.737 154.356,129.261 v1(155.473,129.261)
  other v1: 152.146,120.904
NetR32_U1_1: R32_U1.1 R35_U1.1 U6_U1.1 | length 5.7
  Top Layer w0.762: U6_U1.1@68.402,31.166 71.374,31.166 71.399,31.191 ; R32_U1.1@71.399,33.122 71.399,31.191 ; R35_U1.1@71.425,30.48 71.399,30.505 71.399,31.191
NetR32_U2_1: R32_U2.1 R35_U2.1 U6_U2.1 | length 5.2
  Top Layer w0.762: R32_U2.1@230.988,52.807 230.988,54.127 ; R35_U2.1@231.064,55.194 230.988,55.118 230.988,54.127 ; U6_U2.1@233.705,54.254 231.115,54.254 230.988,54.127
NetR35_U1_2: R35_U1.2 R36_U1.1 | length 2.8
  Top Layer w0.762: R35_U1.2@73.812,30.48 76.479,30.48 R36_U1.1@76.606,30.353
NetR35_U2_2: R35_U2.2 R36_U2.1 | length 2.5
  Top Layer w0.762: R36_U2.1@226.365,55.626 228.244,55.626 R35_U2.2@228.676,55.194
NetR39_U1_1: R39_U1.1 R41_U1.1 U9_U1.8 | length 6.6
  Top Layer w0.762: U9_U1.8@68.301,67.869 69.469,67.869 R41_U1.1@71.196,69.596 R39_U1.1@71.196,72.593
NetR39_U2_1: R39_U2.1 R41_U2.1 U9_U2.8 | length 5.6
  Top Layer w0.762: R39_U2.1@231.14,69.875 231.14,72.136 232.867,73.863 U9_U2.8@233.782,73.863
NetR41_U1_2: R41_U1.2 R42_U1.1 | length 2.3
  Top Layer w0.762: R41_U1.2@73.584,69.596 75.895,69.596 R42_U1.1@75.921,69.621
NetR41_U2_2: R41_U2.2 R42_U2.1 | length 2.3
  Top Layer w0.762: R42_U2.1@226.466,72.542 226.568,72.441 R41_U2.2@228.676,72.441
NetR44_U1_2: R44_U1.2 U7_U1.7 | length 150.2
  Top Layer w0.381: R44_U1.2@87.757,122.733 92.583,122.733 94.17,124.32 94.183,124.308 v1(97.282,124.308) ; U7_U1.7@114.503,31.572 123.292,31.572 131.242,39.522 131.242,94.336 134.569,97.663 v1(134.569,106.528)
  Bottom Layer w0.381: v1(97.282,124.308) 97.714,124.739 127.66,124.739 134.569,117.831 v1(134.569,106.528)
NetR44_U2_2: R44_U2.2 U7_U2.7 | length 88.4
  Top Layer w0.381: v1(170.713,120.421) 171.298,121.006 R44_U2.2@172.517,121.006 ; v1(183.718,55.905) 183.794,55.982 U7_U2.7@190.221,55.982
  Bottom Layer w0.381: v1@170.713,120.498 170.713,118.593 167.221,115.1 167.221,79.819 170.536,76.505 181.077,76.505 181.889,75.692 181.889,56.591 182.524,55.956 v1@183.794,55.956
NetR45_U1_2: R45_U1.2 U15_U1.1 | length 3.7
  Top Layer w1.016: R45_U1.2@63.424,119.558 63.398,119.583 63.398,122.123 63.551,122.276 U15_U1.1@64.414,122.276
NetR45_U2_2: R45_U2.2 U15_U2.1 | length 2.4
  Top Layer w0.508: R45_U2.2@197.942,123.165 200.33,123.165 U15_U2.1@200.355,123.19
NetR46_U1_2: R46_U1.2 U15_U1.3 | length 38.1
  Top Layer w0.508: U15_U1.3@64.414,124.816 65.456,124.816 65.989,124.282 v1(65.989,123.673) ; v1(73.584,121.564) 76.505,121.564 76.53,121.539 76.86,121.869 v1(78.486,121.869) ; v1(93.878,122.631) 94.463,122.631 95.098,123.266 99.822,123.266 R46_U1.2@99.873,123.317
  Bottom Layer w0.508: v1(65.989,123.673) 68.097,121.564 v1(73.584,121.564) ; v1@78.486,121.539 82.436,121.539 82.487,121.59 83.223,121.59 83.274,121.539 92.786,121.539 v1(93.878,122.631)
NetR46_U2_2: R46_U2.2 U15_U2.3 | length 2.5
  Top Layer w0.762: R46_U2.2@197.942,120.548 198.044,120.65 U15_U2.3@200.355,120.65
NetR49_U1_1: R49_U1.1 R52_U1.1 U9_U1.1 | length 5.7
  Top Layer w0.762: U9_U1.1@68.301,58.979 70.968,58.979 R52_U1.1@70.993,58.953 ; R52_U1.1@71.222,58.674 R49_U1.1@71.222,61.697
NetR49_U2_1: R49_U2.1 R52_U2.1 U9_U2.1 | length 5.7
  Top Layer w0.762: R52_U2.1@230.937,83.109 R52_U2.1@231.013,83.033 ; R49_U2.1@231.013,80.315 R52_U2.1@231.013,83.033 ; U9_U2.1@233.782,82.753 231.292,82.753 R52_U2.1@231.013,83.033
NetR52_U1_2: R52_U1.2 R53_U1.1 | length 2.2
  Top Layer w0.762: R52_U1.2@73.787,58.699 R53_U1.1@75.997,58.699
NetR52_U2_2: R52_U2.2 R53_U2.1 | length 2.4
  Top Layer w0.762: R53_U2.1@226.187,83.185 226.263,83.109 R52_U2.2@228.549,83.109
NetR57_U1_2: R57_U1.2 U10_U1.7 | length 115.8
  Top Layer w0.381: v1(98.374,122.123) 96.012,122.123 R57_U1.2@95.047,121.158 ; U10_U1.7@114.198,60.477 124.054,60.477 127.102,63.525 127.102,92.761 133.121,98.781 v1(133.121,105.258) ; R57_U1.2@95.047,121.158 95.047,120.752 R57_U1.2@94.844,120.548 94.844,120.955 R57_U1.2@95.047,121.158
  Bottom Layer w0.381: v1(98.374,122.123) 98.4,122.098 103.607,122.098 104.775,123.266 ; 107.213,123.266 104.775,123.266 ; v1(133.121,105.258) 133.121,117.551 127.406,123.266 104.775,123.266
NetR57_U2_2: R57_U2.2 U10_U2.7 | length 70.5
  Top Layer w0.381: v1(182.855,82.956) U10_U2.7@190.195,82.956
  Bottom Layer w0.381: v1(182.855,82.956) 173.228,82.956 171.501,84.684 171.501,112.192 179.07,119.761 190.703,119.761 191.135,120.193 v1(191.135,120.828)
NetR59_U1_1: R59_U1.1 R60_U1.1 U11_U1.8 | length 6.1
  Top Layer w0.762: U11_U1.8@67.767,98.831 70.002,98.831 71.069,99.898 R59_U1.1@71.069,102.26
NetR59_U2_1: R59_U2.1 R60_U2.1 U11_U2.8 | length 6.2
  Top Layer w0.762: R59_U2.1@230.962,98.527 R60_U2.1@230.962,101.524 231.8,102.362 U11_U2.8@233.782,102.362
NetR60_U1_2: R60_U1.2 R61_U1.1 | length 4.1
  Top Layer w0.762: R60_U1.2@73.482,99.441 R61_U1.1@77.546,99.441
NetR60_U2_2: R60_U2.2 R61_U2.1 | length 2.1
  Top Layer w1.016: R61_U2.1@226.517,101.549 228.549,101.549 R60_U2.2@228.575,101.524
NetR64_U1_1: R64_U1.1 R66_U1.1 U11_U1.1 | length 6.1
  Top Layer w0.762: U11_U1.1@67.767,89.941 R64_U1.1@70.917,89.941 ; R64_U1.1@70.841,89.941 R64_U1.1@70.891,89.891 70.891,87.071 R66_U1.1@70.917,87.046
NetR64_U2_1: R64_U2.1 R66_U2.1 U11_U2.1 | length 5.3
  Top Layer w0.762: R64_U2.1@231.038,108.433 231.038,110.82 R66_U2.1@231.064,110.846 231.47,111.252 U11_U2.1@233.782,111.252
NetR66_U1_2: R66_U1.2 R67_U1.1 | length 2.2
  Top Layer w0.762: R66_U1.2@73.304,87.046 R67_U1.1@75.54,87.046
NetR66_U2_2: R66_U2.2 R67_U2.1 | length 2.5
  Top Layer w0.762: R67_U2.1@226.365,111.277 226.797,110.846 R66_U2.2@228.676,110.846
NetR70_U1_2: R70_U1.2 U12_U1.7 | length 114.6
  Top Layer w0.381: R70_U1.2@64.287,112.801 65.837,112.801 v1(66.294,112.344) ; U12_U1.7@114.021,88.9 115.367,88.9 115.9,88.367 120.701,88.367 124.282,91.948 124.282,93.497 131.623,100.838 v1(131.623,106.502)
  Bottom Layer w0.381: v1@66.243,112.344 v1(66.294,112.344) 88.621,112.344 90.246,113.97 90.246,115.291 95.072,120.117 103.2,120.117 105.131,122.047 126.644,122.047 131.623,117.069 v1(131.623,106.502)
NetR70_U2_2: R70_U2.2 U12_U2.7 | length 60.7
  Top Layer w0.381: v1(141.224,121.488) R70_U2.2@141.224,122.936 ; v1(166.395,108.56) 167.335,107.62 171.679,107.62 174.549,110.49 v1(174.981,110.49) ; v1(182.829,110.49) U12_U2.7@190.119,110.49
  Bottom Layer w0.381: v1(141.224,121.488) 141.732,120.98 141.732,117.399 143.662,115.468 153.213,115.468 154.635,114.046 ; 154.559,114.046 154.635,114.046 ; v1(166.395,108.56) 164.795,108.56 163.627,109.728 163.627,111.709 162.128,113.208 155.473,113.208 154.635,114.046 ; v1(174.981,110.49) 175.031,110.541 176.378,110.541 176.428,110.49 v1(182.829,110.49)
NetR72_U1_1: R72_U1.1 R73_U1.2 U13_U1.5 | length 14.1
  Top Layer w0.508: R72_U1.1@70.917,111.887 72.568,111.887 ; U13_U1.5@72.517,113.995 72.568,113.944 72.568,111.887 ; R73_U1.2@81.966,109.779 80.848,110.896 76.022,110.896 75.032,111.887 72.568,111.887
NetR72_U2_1: R72_U2.1 R73_U2.2 U13_U2.5 | length 9.7
  Top Layer w0.508: U13_U2.5@143.586,123.393 143.586,122.707 142.469,121.59 142.469,117.907 142.824,117.551 143.485,117.551 143.84,117.196 ; R73_U2.2@143.84,115.773 143.84,117.196 ; R72_U2.1@143.916,117.831 143.84,117.754 143.84,117.196
NetR73_U1_1: R73_U1.1 U14_U1.7 | length 3.9
  Top Layer w0.508: 84.887,109.906 85.623,110.642 U14_U1.7@88.443,110.642
NetR73_U2_1: R73_U2.1 U14_U2.7 | length 4.3
  Top Layer w0.508: R73_U2.1@143.84,113.386 143.866,113.36 144.54,113.36 146.101,111.8 U14_U2.7@146.101,110.414
NetR74_U1_1: R74_U1.1 R75_U1.1 | length 2.3
  Top Layer w0.508: R75_U1.1@110.185,112.217 R74_U1.1@112.522,112.217
NetR74_U2_1: R74_U2.1 R75_U2.1 | length 2.4
  Top Layer w0.762: R74_U2.1@147.269,89.052 147.32,89.103 R75_U2.1@147.32,91.44
NetR77_U1_1: R77_U1.1 R78_U1.2 U13_U1.6 | length 10.7
  Top Layer w0.508: U13_U1.6@72.517,115.265 73.533,115.265 74.574,114.224 74.574,114.275 76.429,112.42 R78_U1.2@81.94,112.42
NetR77_U2_1: R77_U2.1 R78_U2.2 U13_U2.6 | length 9.2
  Top Layer w0.508: U13_U2.6@144.856,123.393 144.856,121.945 145.44,121.361 145.44,118.11 145.821,117.729 R77_U2.1@146.863,117.729 146.888,117.704 R78_U2.2@146.888,115.646
NetR78_U1_1: R78_U1.1 U14_U1.6 | length 4.3
  Top Layer w0.508: R78_U1.1@84.328,112.42 84.836,111.912 U14_U1.6@88.443,111.912
NetR78_U2_1: R78_U2.1 U14_U2.6 | length 2.3
  Top Layer w0.508: U14_U2.6@147.371,110.414 147.371,112.725
PGND: C34.2 C35.2 C36.2 C37.2 C38.2 C39.2 C40.2 C94.2 C95.2 C96.2 C97.2 C98.2 C99.2 C100.2 C101.2 C102.2 P5.9 P5.10 P5.19 P5.20 R79.1 R80.1 | length 180.9
  Top Layer w2.032: 169.901,22.581 169.901,21.234 v2(170.434,20.701) 170.485,20.752 v2(174.981,20.752) 174.981,21.565 173.965,22.581
  Top Layer w2.54: R80.1@163.652,40.234 163.652,36.119 169.901,29.87 169.901,22.581 171.958,22.581 ; R80.1@165.659,40.615 165.659,36.982 171.958,30.683 171.958,22.581 ; 167.284,37.541 173.965,30.861 173.965,22.581 171.958,22.581 ; 167.361,34.493 R80.1@167.361,40.716
  Bottom Layer w1.016: 185.115,11.532 186.76,9.887 P5.9@186.76,6.223
  Bottom Layer w2.54: 161.036,18.009 169.291,18.009 ; v2@170.205,20.676 v2(172.72,20.676) 172.72,17.069 ; v2@172.974,20.752 v2(174.981,20.752) 174.981,16.764 ; 173.406,14.58 176.327,14.58 ; 173.634,11.532 176.689,11.532 179.454,8.766 ; 173.965,18.593 173.38,18.009 ; 181.127,8.966 181.14,8.979 181.14,13.119 ; P5.20@183.902,4.318 179.454,8.766 ; 185.801,7.772 185.801,8.458 ; 169.291,18.009 171.577,18.009 ; 169.291,18.009 169.951,18.669 169.951,20.701 171.577,19.075 171.577,18.009 ; 171.577,18.009 173.38,18.009 ; 173.38,18.009 176.251,18.009 ; 176.251,18.009 177.127,17.132 ; 176.251,18.009 178.308,18.009 185.801,10.516 185.801,8.458 ; 176.327,14.58 176.327,16.332 177.127,17.132 ; 176.327,14.58 179.454,11.452 ; 177.127,17.132 179.454,14.805 ; 179.454,8.766 179.454,11.452 ; 179.454,11.452 179.454,14.805 ; 179.454,14.805 181.14,13.119 ; 181.14,13.119 185.801,8.458
  other v2: 139.065,13.97 141.732,13.995 144.348,14.021 138.328,19.583 135.712,19.609 135.763,22.733 138.354,22.733
PGND_U1: C15_U1.2 C16_U1.2 C17_U1.2 C18_U1.2 C19_U1.2 C20_U1.2 C21_U1.2 C22_U1.2 C24_U1.2 C25_U1.1 C26_U1.1 C27_U1.1 C29_U1.1 C30_U1.1 C69_U1.1 C70_U1.2 C71_U1.2 C72_U1.2 C73_U1.2 C74_U1.2 C75_U1.2 C76_U1.2 C77_U1.2 C78_U1.2 C79_U1.2 C80_U1.2 C81_U1.2 C82_U1.2 C83_U1.2 C84_U1.2 C85_U1.2 C86_U1.2 C87_U1.2 C88_U1.2 C89_U1.2 C90_U1.2 C91_U1.2 C92_U1.2 C93_U1.2 C106_U1.2 C107_U1.2 C108_U1.2 C109_U1.2 C110_U1.2 C111_U1.2 C112_U1.2 C113_U1.2 D2_U1.1 Q3_U1.2 Q3_U1.3 Q3_U1.5 Q3_U1.6 Q3_U1.7 Q5_U1.2 Q5_U1.3 Q5_U1.5 Q5_U1.6 Q5_U1.7 Q8_U1.2 Q8_U1.3 Q8_U1.5 Q8_U1.6 Q8_U1.7 R16_U1.2 R21_U1.2 R22_U1.1 R24_U1.2 R25_U1.1 R37_U1.1 R54_U1.1 R68_U1.1 R76_U1.2 R79.2 U3_U1.7 U3_U1.9 U6_U1.2 U9_U1.2 U11_U1.2 U14_U1.3 U14_U1.4 V1_U1.1 | length 184.9
  Top Layer w1.016: C25_U1.1@5.207,97.993 5.207,96.901 ; v4(8.738,106.934) 8.788,106.883 D2_U1.1@11.176,106.883 ; C26_U1.1@12.217,95.021 13.183,95.021 ; R22_U1.1@14.173,95.047 14.148,95.021 13.183,95.021 ; U3_U1.7@16.281,100.508 13.818,100.508 U3_U1.9@13.208,99.898 13.183,99.873 13.183,95.021 ; C27_U1.1@21.234,96.215 v1(22.2,96.215) 23.216,96.215 R25_U1.1@23.317,96.114 ; C21_U1.2@28.829,104.851 v4(30.48,104.851) 32.004,104.851 C22_U1.2@32.055,104.902 32.055,107.34 31.775,107.62 R16_U1.2@30.886,107.62 ; v4(66.142,91.059) 66.142,88.544 66.37,88.316 66.98,88.316 66.98,79.705 C111_U1.2@66.878,79.604 ; v4@66.192,91.211 U11_U1.2@68.199,91.211 ; v4(66.345,60.096) 66.345,58.395 67.056,57.683 C107_U1.2@67.056,53.95 C109_U1.2@67.056,51.765 ; v4@66.37,60.249 U9_U1.2@68.301,60.249 ; v4(66.599,32.283) 66.599,30.353 67.132,29.82 C113_U1.2@67.132,22.149 ; v4@66.624,32.436 U6_U1.2@68.402,32.436 ; 67.818,78.003 69.494,79.68 v2(72.212,79.68) ; 97.917,113.182 U14_U1.4@99.949,113.182 ; U14_U1.3@99.949,111.912 97.79,111.912 v4(97.739,111.963) 97.739,115.037 98.374,115.672 103.657,115.672 104.115,115.214 C30_U1.1@104.115,114.579 ; v4(102.387,105.893) C29_U1.1@102.387,107.467 ; C30_U1.1@103.988,114.427 103.988,112.116 106.401,112.116 106.477,112.192 ; C69_U1.1@105.613,112.192 106.477,112.192 ; R76_U1.2@107.848,112.217 107.823,112.192 106.477,112.192 ; 5.207,96.901 5.207,95.098 R24_U1.2@5.232,95.072 2.642,95.072 v4(2.591,95.123) 2.591,96.952 C24_U1.2@2.667,97.028 5.08,97.028 5.207,96.901
  Top Layer w1.524: v3(36.271,104.673) 36.271,104.724 36.652,104.724 39.573,107.645 60.63,107.645 v3(61.62,106.655) ; R37_U1.1@81.077,27.991 83.388,27.991 v2(83.718,28.321) ; C70_U1.2@116.637,10.389 120.244,10.389 C15_U1.2@120.294,10.439 ; 117.958,11.455 119.761,13.259
  Bottom Layer w1.016: v4@97.739,111.709 97.739,98.527 97.765,98.501 ; 101.143,102.489 102.387,103.734 v4(102.387,105.893)
  Bottom Layer w1.524: v4(30.48,104.851) 30.658,104.673 v3(36.271,104.673) ; v3(61.62,106.655) 64.059,106.655 72.238,98.476 v2(72.238,83.922)
  other v2: 110.16,-1.372 113.513,-1.346 129.007,12.827 125.12,12.929 120.879,12.954 75.235,13.36 78.461,13.386 68.58,13.411 72.009,13.437 81.686,13.487 125.07,15.977 120.879,16.002 128.981,16.027 81.712,16.129 72.009,16.866 81.61,19.05 72.034,20.066 89.052,22.835 83.693,22.911 86.411,22.936 72.161,23.19 83.693,25.552 72.136,27.203 83.668,30.785 88.925,51.257 83.566,51.333 86.284,51.359 72.161,51.46 83.566,53.975 72.161,55.372 83.591,56.744 83.541,59.207 88.646,79.68 83.287,79.756 86.004,79.781 83.287,82.398 83.312,85.166 83.261,87.63
  other v3: 33.909,75.387 2.591,75.54 2.667,86.131 33.96,86.436 34.315,96.088 3.556,107.163
  other v4: 13.157,96.749 13.208,99.035 13.233,100.762